# EAGLE board elysium_v0_2 (EAGLE 6.5.0)
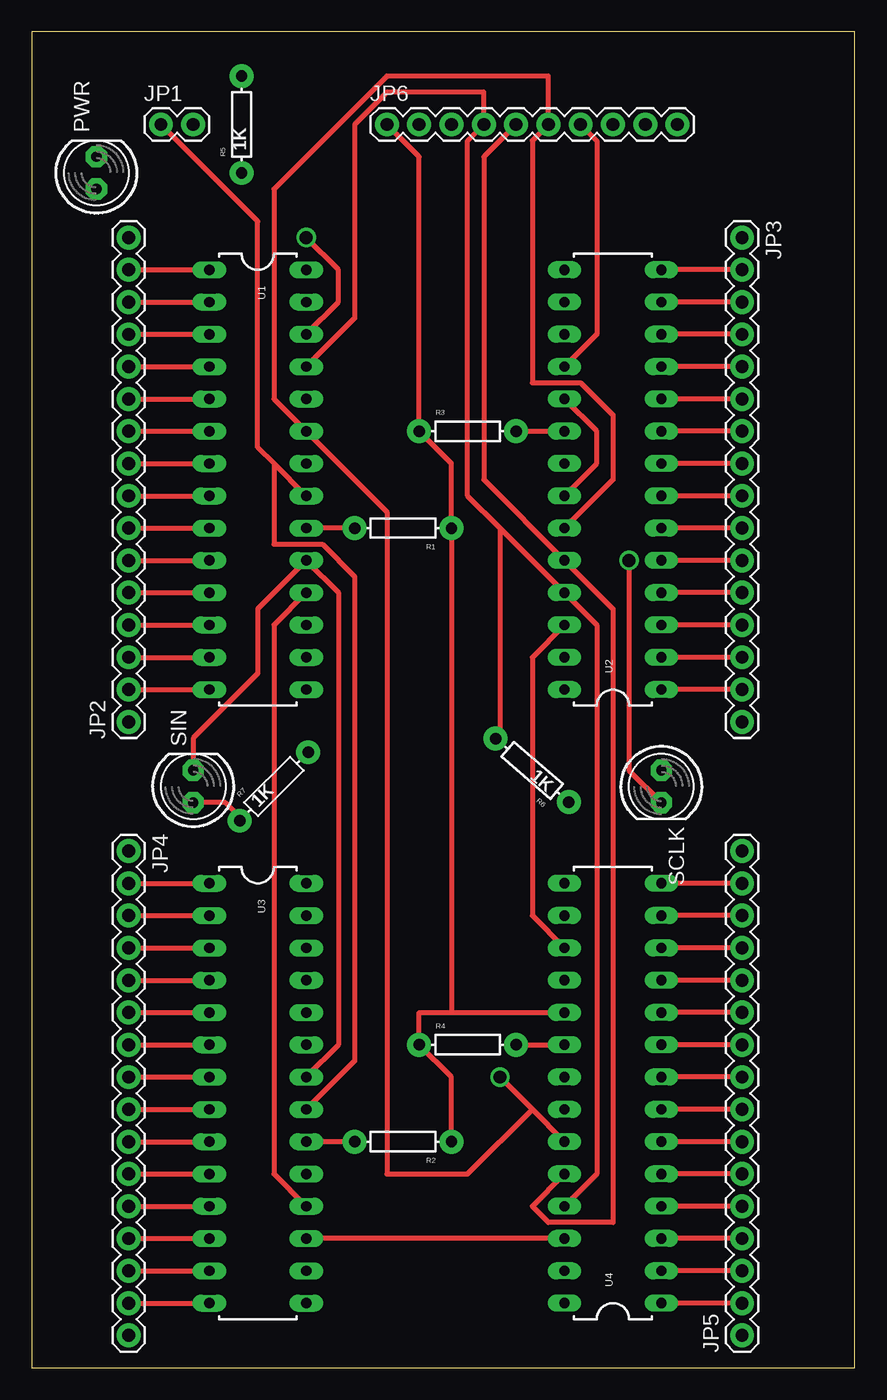
[diagram p0: board, top side]
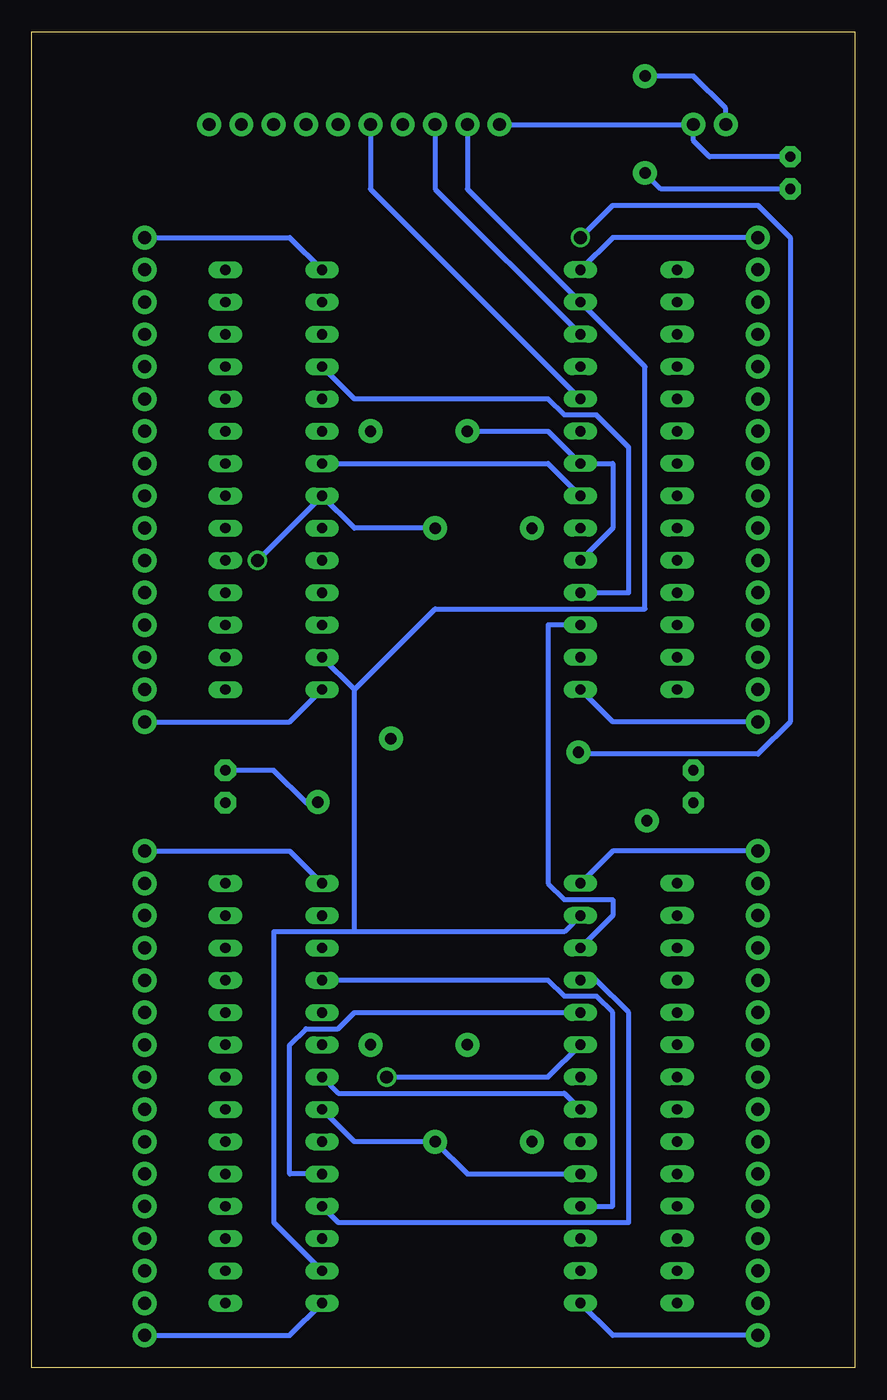
[diagram p1: board, bottom side, seen from below]

Size 64.75 x 105.08 mm. Coordinates in mm from the lower left corner, seen from the top.
Outline: 0,0 64.75,0 64.75,105.08 0,105.08 0,0
Copper layers (1*16): Top 0.035mm / dielectric 1.5mm / Bottom 0.035mm
Design rules "default *": minimum track width 16mil, minimum drill 40mil, track to track 8mil, track to pad 8mil, pad to pad 8mil, via to via 8mil, smd to smd 8mil, copper to edge 40mil, drill to drill 8mil, minimum pad ring 10mil, minimum via ring 8mil, stop-mask expansion 4mil, vias tented up to drill 0mil, thermal gap 10mil

## Footprints (pad centres in the part's own frame; a part is rotated, then mirrored left to right if it is on the bottom)
1X02 = drill 1.016 pad 1.88: 1 0,0; 2 2.54,0
1X16 = drill 1.016 pad 1.88: 1 0,0; 2 2.54,0; 3 5.08,0; 4 7.62,0; 5 10.16,0; 6 12.7,0; 7 15.24,0; 8 17.78,0; 9 20.32,0; 10 22.86,0; 11 25.4,0; 12 27.94,0; 13 30.48,0; 14 33.02,0; 15 35.56,0; 16 38.1,0
1X10 = drill 1.016 pad 1.88: 1 0,0; 2 2.54,0; 3 5.08,0; 4 7.62,0; 5 10.16,0; 6 12.7,0; 7 15.24,0; 8 17.78,0; 9 20.32,0; 10 22.86,0
LED5MM = drill 0.813 pad 1.676 octagon: A -1.27,0; K 1.27,0
AXIAL-0.3EZ = drill 0.9 pad 1.88: P$1 -3.81,0; P$2 3.81,0
DIL28-3 = drill 0.813 long: 1 -16.51,-3.81; 2 -13.97,-3.81; 3 -11.43,-3.81; 4 -8.89,-3.81; 5 -6.35,-3.81; 6 -3.81,-3.81; 7 -1.27,-3.81; 8 1.27,-3.81; 9 3.81,-3.81; 10 6.35,-3.81; 11 8.89,-3.81; 12 11.43,-3.81; 13 13.97,-3.81; 14 16.51,-3.81; 15 16.51,3.81; 16 13.97,3.81; 17 11.43,3.81; 18 8.89,3.81; 19 6.35,3.81; 20 3.81,3.81; 21 1.27,3.81; 22 -1.27,3.81; 23 -3.81,3.81; 24 -6.35,3.81; 25 -8.89,3.81; 26 -11.43,3.81; 27 -13.97,3.81; 28 -16.51,3.81

## Placement (x,y rotation side)
JP1  M02PTH  [1X02]  10.16,97.79 0 top
JP2  M16PTH  [1X16]  7.62,50.8 90 top
JP3  M16PTH  [1X16]  55.88,88.9 270 top
JP4  M16PTH  [1X16]  7.62,40.64 270 top
JP5  M16PTH  [1X16]  55.88,2.54 90 top
JP6  M10"  [1X10]  27.94,97.79 0 top
PWR  [LED5MM]  5.08,93.98 90 top
R1  [AXIAL-0.3EZ]  29.21,66.04 180 top
R2  [AXIAL-0.3EZ]  29.21,17.78 180 top
R3  [AXIAL-0.3EZ]  34.29,73.66 0 top
R4  [AXIAL-0.3EZ]  34.29,25.4 0 top
R5  1K  [AXIAL-0.3EZ]  16.51,97.79 90 top
R6  1K  [AXIAL-0.3EZ]  39.37,46.99 139.1 top
R7  1K  [AXIAL-0.3EZ]  19.05,45.72 45 top
SCLK  [LED5MM]  49.53,45.72 270 top
SIN  [LED5MM]  12.7,45.72 90 top
U1  TLC5940-NT  [DIL28-3]  17.78,69.85 270 top
U2  TLC5940-NT  [DIL28-3]  45.72,69.85 90 top
U3  TLC5940-NT  [DIL28-3]  17.78,21.59 270 top
U4  TLC5940-NT  [DIL28-3]  45.72,21.59 90 top

## Library data of the parts
JP1-JP6 = SparkFun-Connectors
PWR SCLK SIN = adafruit
R1-R7 = SparkFun-Resistors
U1-U4 = SparkFun-DigitalIC

## Nets
BLANK: JP6.6 U1.23 U2.23 U3.23 U4.23
GND: JP1.2 JP6.1 PWR.K R1.P$1 R2.P$1 R3.P$1 R4.P$1 SCLK.K SIN.K U1.19 U1.22 U2.19 U2.22 U3.19 U3.22 U4.19 U4.22
GSCLK: JP6.7 U1.18 U2.18 U3.18 U4.18
N$1: JP2.16 U1.28
N$2: JP2.15 U1.1
N$3: JP2.14 U1.2
N$4: JP2.13 U1.3
N$5: JP2.12 U1.4
N$6: JP2.11 U1.5
N$7: JP2.10 U1.6
N$8: JP2.9 U1.7
N$9: JP2.8 U1.8
N$10: JP2.7 U1.9
N$11: JP2.6 U1.10
N$12: JP2.5 U1.11
N$13: JP2.4 U1.12
N$14: JP2.3 U1.13
N$15: JP2.2 U1.14
N$16: JP2.1 U1.15
N$17: JP4.1 U3.28
N$18: JP4.2 U3.1
N$19: JP4.3 U3.2
N$20: JP4.4 U3.3
N$21: JP4.5 U3.4
N$22: JP4.6 U3.5
N$23: JP4.7 U3.6
N$24: JP4.8 U3.7
N$25: JP4.9 U3.8
N$26: JP4.10 U3.9
N$27: JP4.11 U3.10
N$28: JP4.12 U3.11
N$29: JP4.13 U3.12
N$30: JP4.14 U3.13
N$31: JP4.15 U3.14
N$32: JP4.16 U3.15
N$33: JP3.16 U2.28
N$34: JP3.15 U2.1
N$35: JP3.14 U2.2
N$36: JP3.13 U2.3
N$37: JP3.12 U2.4
N$38: JP3.11 U2.5
N$39: JP3.10 U2.6
N$40: JP3.9 U2.7
N$41: JP3.8 U2.8
N$42: JP3.7 U2.9
N$43: JP3.6 U2.10
N$44: JP3.5 U2.11
N$45: JP3.4 U2.12
N$46: JP3.3 U2.13
N$47: JP3.2 U2.14
N$48: JP3.1 U2.15
N$49: JP5.1 U4.28
N$50: JP5.2 U4.1
N$51: JP5.3 U4.2
N$52: JP5.4 U4.3
N$53: JP5.5 U4.4
N$54: JP5.6 U4.5
N$55: JP5.7 U4.6
N$56: JP5.8 U4.7
N$57: JP5.9 U4.8
N$58: JP5.10 U4.9
N$59: JP5.11 U4.10
N$60: JP5.12 U4.11
N$61: JP5.13 U4.12
N$62: JP5.14 U4.13
N$63: JP5.15 U4.14
N$64: JP5.16 U4.15
N$65: U1.17 U3.26
N$66: U3.17 U4.26
N$67: U2.26 U4.17
N$68: R1.P$2 U1.20
N$69: PWR.A R5.P$1
N$70: R2.P$2 U3.20
N$71: JP6.8
N$72: JP6.9
N$73: JP6.10
N$74: R6.P$1 SCLK.A
N$75: R3.P$2 U2.20
N$76: R7.P$1 SIN.A
N$77: R4.P$2 U4.20
SCLK: JP6.4 R6.P$2 U1.25 U2.25 U3.25 U4.25
SIN: JP6.3 R7.P$2 U1.26
VCC: JP1.1 R5.P$2 U1.21 U2.21 U3.21 U4.21
VPRG: JP6.2 U1.27 U2.27 U3.27 U4.27
XLAT: JP6.5 U1.24 U2.24 U3.24 U4.24

## Tracks (layer width: path | path; a pad name or v marks a point on that pad's centre or on a via)
BLANK  (via drill 1.02)
  Top 0.406: U4.23 39.37,20.32 | 39.37,20.32 v36.83,22.86 | U2.23 45.72,69.85 45.72,74.93 43.18,77.47 39.37,77.47 39.37,96.52 JP6.6 40.64,101.6 27.94,101.6 19.05,92.71 19.05,76.2 U1.23 27.94,67.31 27.94,15.24 34.29,15.24 39.37,20.32
  Bottom 0.406: U3.23 24.13,22.86 v36.83,22.86
GND  (via drill 1.02)
  Top 0.406: U3.22 24.13,25.4 24.13,60.96 U1.19 17.78,59.69 17.78,54.61 12.7,49.53 SIN.K | 33.02,27.94 30.48,27.94 R4.P$1 33.02,22.86 R2.P$1 | 33.02,27.94 U4.19 | U2.19 44.45,73.66 44.45,71.12 U2.22 | JP6.1 30.48,95.25 R3.P$1 33.02,71.12 R1.P$1 33.02,27.94 | SCLK.K 46.99,46.99 v46.99,63.5
  Bottom 0.406: U3.19 30.48,15.24 R2.P$1 39.37,17.78 U4.22 | JP6.1 JP1.2 12.7,96.52 11.43,95.25 PWR.K | R3.P$1 24.13,73.66 U1.22 19.05,71.12 19.05,66.04 U1.19 | R1.P$1 39.37,66.04 U2.22 v46.99,63.5
GSCLK
  Top 0.406: U2.18 44.45,81.28 44.45,96.52 JP6.7 | U3.18 19.05,15.24 19.05,58.42 U1.18
  Bottom 0.406: U4.18 24.13,30.48 22.86,29.21 20.32,29.21 19.05,27.94 19.05,12.7 U3.18 | U2.18 39.37,76.2 24.13,76.2 22.86,74.93 20.32,74.93 17.78,72.39 17.78,60.96 U1.18
N$1
  Bottom 0.406: U1.28 19.05,88.9 JP2.16
N$2
  Top 0.406: JP2.15 U1.1
N$3
  Top 0.406: JP2.14 U1.2
N$4
  Top 0.406: JP2.13 U1.3
N$5
  Top 0.406: JP2.12 U1.4
N$6
  Top 0.406: JP2.11 U1.5
N$7
  Top 0.406: JP2.10 U1.6
N$8
  Top 0.406: JP2.9 U1.7
N$9
  Top 0.406: JP2.8 U1.8
N$10
  Top 0.406: JP2.7 U1.9
N$11
  Top 0.406: JP2.6 U1.10
N$12
  Top 0.406: JP2.5 U1.11
N$13
  Top 0.406: JP2.4 U1.12
N$14
  Top 0.406: JP2.3 U1.13
N$15
  Top 0.406: JP2.2 U1.14
N$16
  Bottom 0.406: U1.15 19.05,50.8 JP2.1
N$17
  Bottom 0.406: U3.28 19.05,40.64 JP4.1
N$18
  Top 0.406: JP4.2 U3.1
N$19
  Top 0.406: JP4.3 U3.2
N$20
  Top 0.406: JP4.4 U3.3
N$21
  Top 0.406: JP4.5 U3.4
N$22
  Top 0.406: JP4.6 U3.5
N$23
  Top 0.406: JP4.7 U3.6
N$24
  Top 0.406: JP4.8 U3.7
N$25
  Top 0.406: JP4.9 U3.8
N$26
  Top 0.406: JP4.10 U3.9
N$27
  Top 0.406: JP4.11 U3.10
N$28
  Top 0.406: JP4.12 U3.11
N$29
  Top 0.406: JP4.13 U3.12
N$30
  Top 0.406: JP4.14 U3.13
N$31
  Top 0.406: JP4.15 U3.14
N$32
  Bottom 0.406: U3.15 19.05,2.54 JP4.16
N$33
  Bottom 0.406: U2.28 44.45,50.8 JP3.16
N$34
  Top 0.406: JP3.15 U2.1
N$35
  Top 0.406: JP3.14 U2.2
N$36
  Top 0.406: JP3.13 U2.3
N$37
  Top 0.406: JP3.12 U2.4
N$38
  Top 0.406: JP3.11 U2.5
N$39
  Top 0.406: JP3.10 U2.6
N$40
  Top 0.406: JP3.9 U2.7
N$41
  Top 0.406: JP3.8 U2.8
N$42
  Top 0.406: JP3.7 U2.9
N$43
  Top 0.406: JP3.6 U2.10
N$44
  Top 0.406: JP3.5 U2.11
N$45
  Top 0.406: JP3.4 U2.12
N$46
  Top 0.406: JP3.3 U2.13
N$47
  Top 0.406: JP3.2 U2.14
N$48
  Bottom 0.406: U2.15 44.45,88.9 JP3.1
N$49
  Bottom 0.406: U4.28 44.45,2.54 JP5.1
N$50
  Top 0.406: JP5.2 U4.1
N$51
  Top 0.406: JP5.3 U4.2
N$52
  Top 0.406: JP5.4 U4.3
N$53
  Top 0.406: JP5.5 U4.4
N$54
  Top 0.406: JP5.6 U4.5
N$55
  Top 0.406: JP5.7 U4.6
N$56
  Top 0.406: JP5.8 U4.7
N$57
  Top 0.406: JP5.9 U4.8
N$58
  Top 0.406: JP5.10 U4.9
N$59
  Top 0.406: JP5.11 U4.10
N$60
  Top 0.406: JP5.12 U4.11
N$61
  Top 0.406: JP5.13 U4.12
N$62
  Top 0.406: JP5.14 U4.13
N$63
  Top 0.406: JP5.15 U4.14
N$64
  Bottom 0.406: U4.15 44.45,40.64 JP5.16
N$65
  Bottom 0.406: U3.26 19.05,35.56 19.05,36.83 22.86,36.83 24.13,38.1 24.13,58.42 U1.17
N$66
  Top 0.406: U4.26 U3.17
N$67
  Top 0.406: U4.17 39.37,35.56 39.37,55.88 U2.26
N$68
  Top 0.406: R1.P$2 U1.20
N$69
  Bottom 0.406: PWR.A 15.24,92.71 R5.P$1
N$70
  Top 0.406: R2.P$2 U3.20
N$74
  Bottom 0.406: SCLK.A 45.72,46.99 43.18,44.45 R6.P$1
N$75
  Top 0.406: R3.P$2 U2.20
N$76
  Top 0.406: SIN.A 15.24,44.45 16.51,43.18 R7.P$1
N$77
  Top 0.406: R4.P$2 U4.20
SCLK
  Top 0.406: U1.25 25.4,82.55 25.4,97.79 27.94,100.33 35.56,100.33 JP6.4 34.29,96.52 34.29,68.58 36.83,66.04 | U4.25 44.45,15.24 44.45,58.42 U2.25 36.83,66.04 | 36.83,66.04 36.83,49.53 R6.P$2
  Bottom 0.406: U3.25 20.32,30.48 17.78,27.94 17.78,11.43 40.64,11.43 U4.25
SIN  (via drill 1.02)
  Top 0.406: v21.59,88.9 24.13,86.36 24.13,83.82 U1.26
  Bottom 0.406: U1.26 33.02,92.71 JP6.3 | v21.59,88.9 19.05,91.44 7.62,91.44 5.08,88.9 5.08,50.8 7.62,48.26 21.59,48.26 R7.P$2
VCC
  Top 0.406: JP1.1 17.78,90.17 17.78,72.39 19.05,71.12 | U1.21 19.05,71.12 | U3.21 25.4,24.13 25.4,62.23 22.86,64.77 19.05,64.77 19.05,71.12
  Bottom 0.406: U3.21 22.86,21.59 40.64,21.59 U4.21 | U1.21 24.13,71.12 U2.21 | JP1.1 10.16,99.06 12.7,101.6 R5.P$2
VPRG
  Bottom 0.406: JP6.2 30.48,92.71 U1.27 16.51,78.74 16.51,59.69 33.02,59.69 39.37,53.34 | U4.27 45.72,11.43 45.72,34.29 39.37,34.29 | 39.37,34.29 22.86,34.29 U3.27 | 39.37,53.34 U2.27 | 39.37,34.29 39.37,53.34
XLAT
  Top 0.406: JP6.5 35.56,95.25 35.56,69.85 U2.24 45.72,59.69 45.72,11.43 40.64,11.43 39.37,12.7 U4.24
  Bottom 0.406: U3.24 39.37,27.94 40.64,26.67 43.18,26.67 44.45,25.4 44.45,15.24 U4.24 | U1.24 38.1,92.71 JP6.5